# Altium PCB canRs485.PcbDoc
Units mm, origin at the board's own origin, x right, y up, seen from the top; angles counter-clockwise.
Board outline 152.4 x 101.6 mm, 2 copper layers (Top Layer, Bottom Layer); 13 components, 16 nets, 62 pads, 7 vias.
Unrouted connection lines stored in the file: 1.
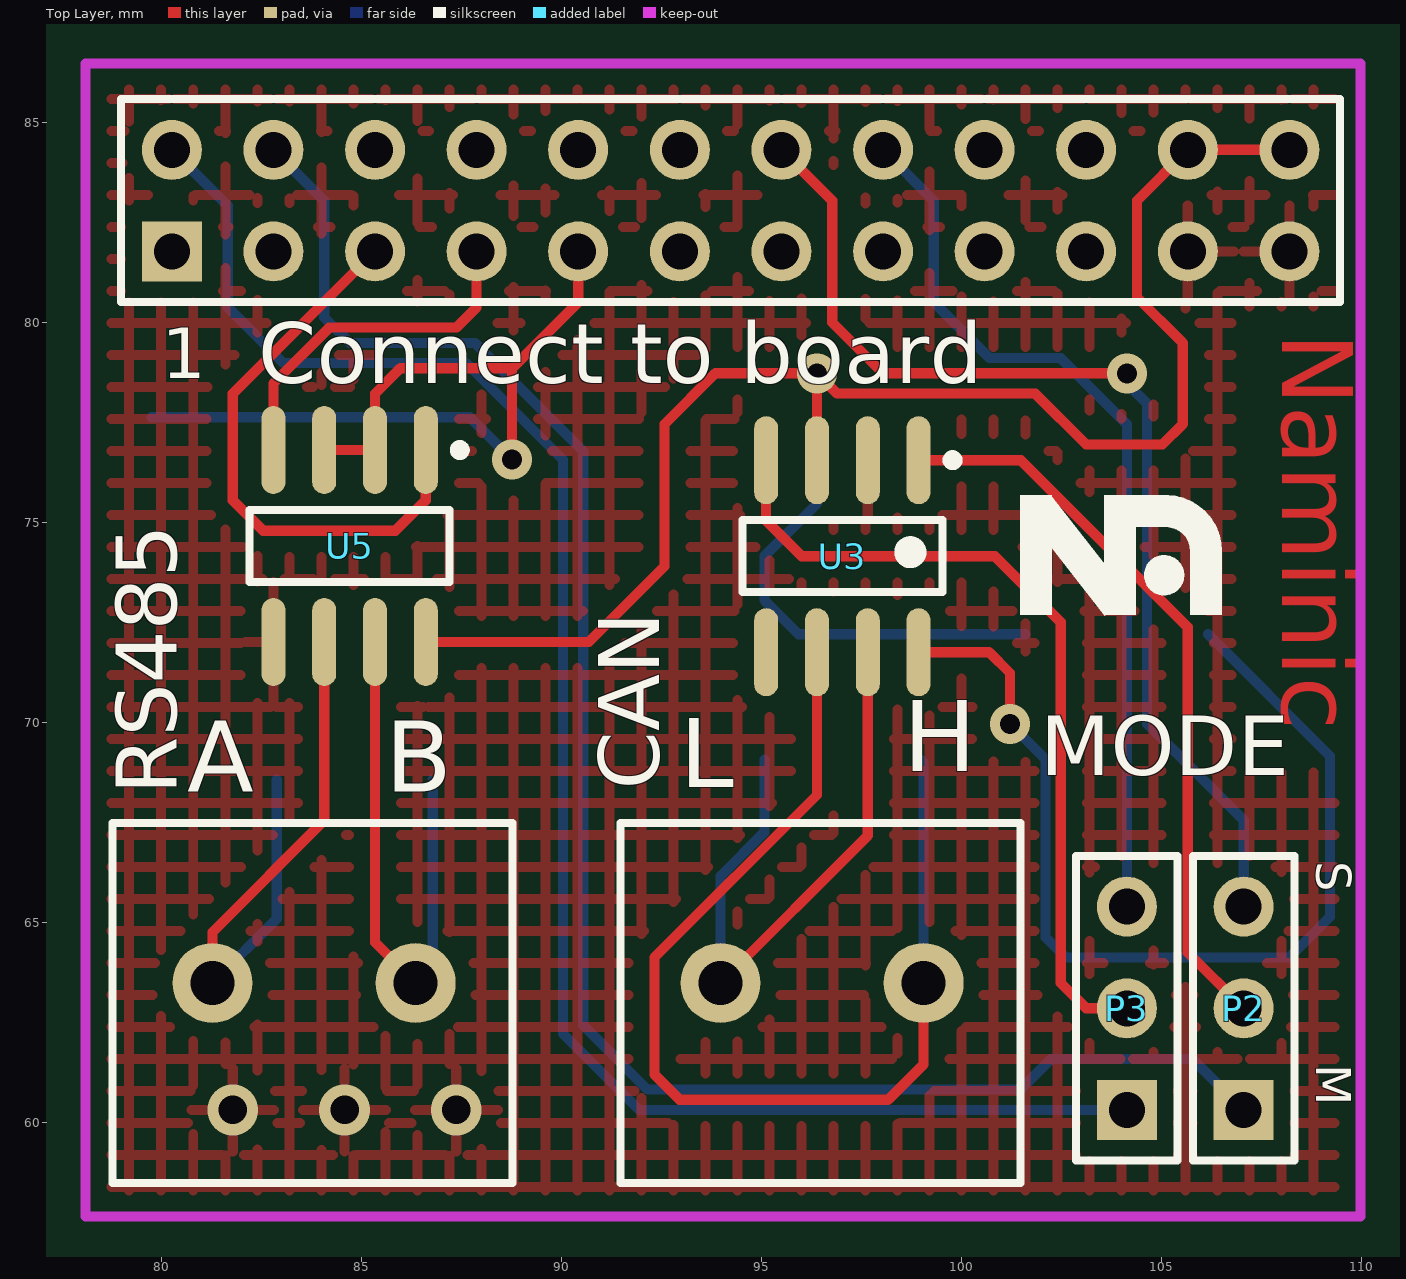
[diagram p0: Top Layer view]
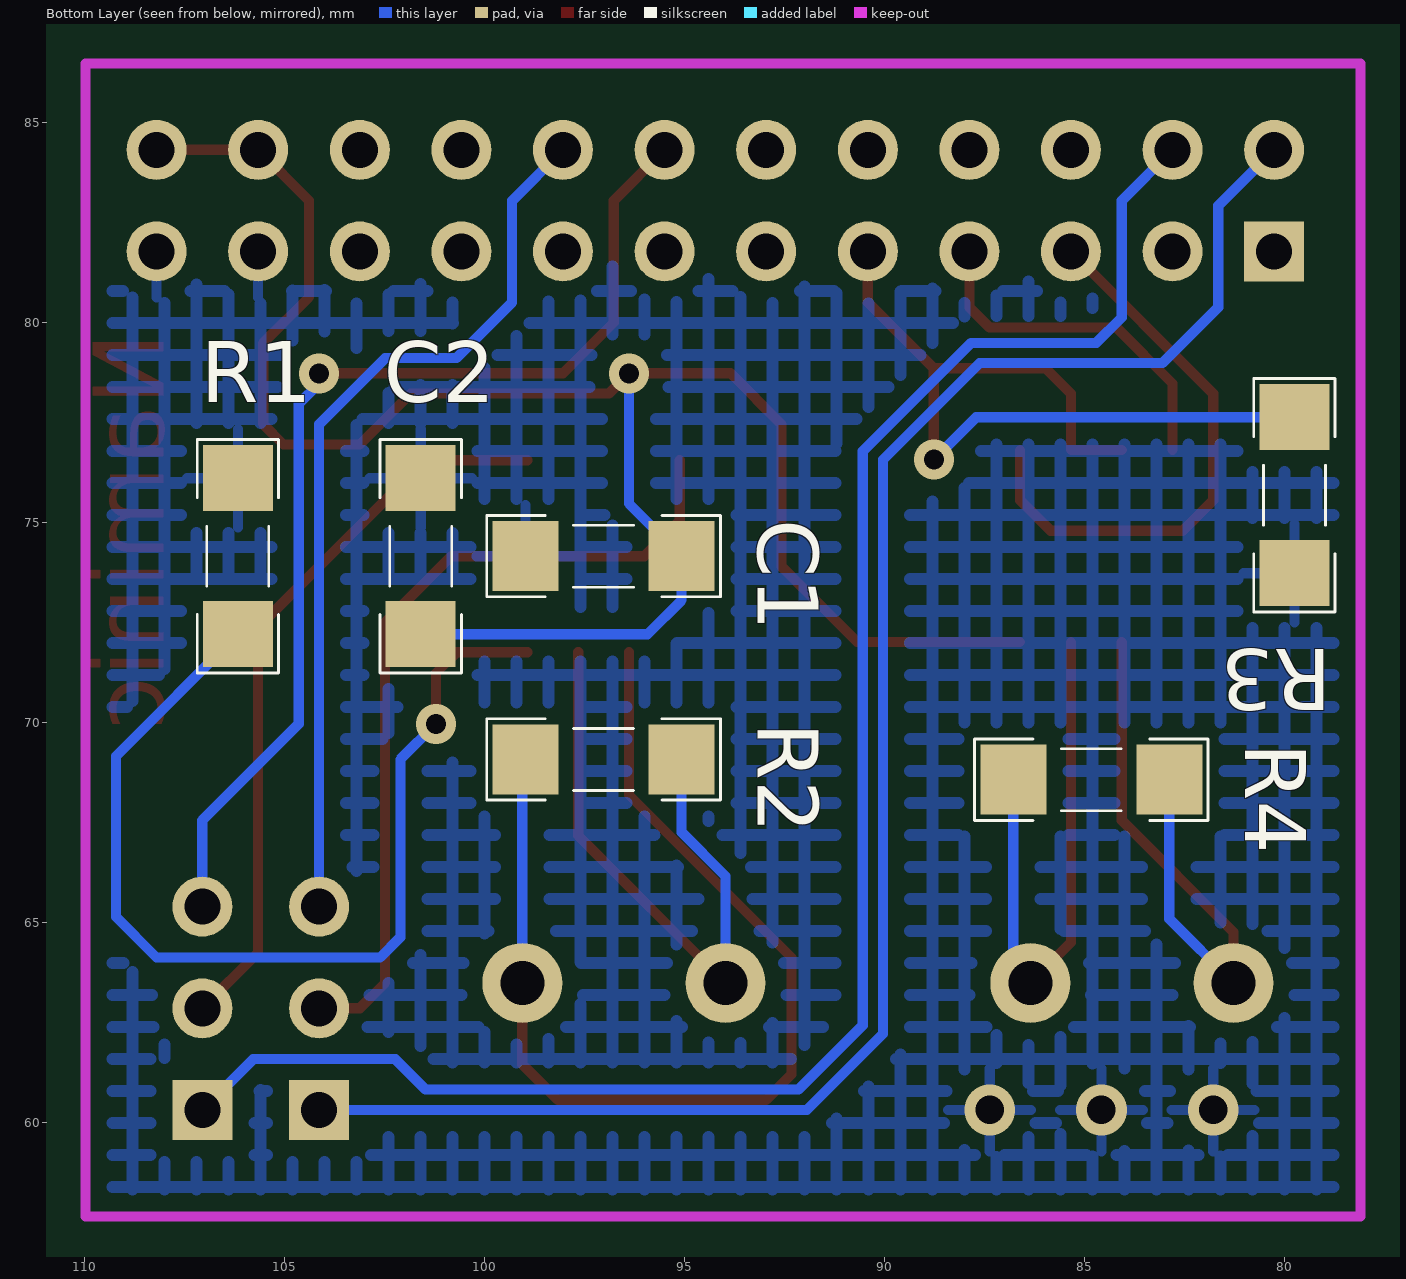
[diagram p1: Bottom Layer view, seen from below]
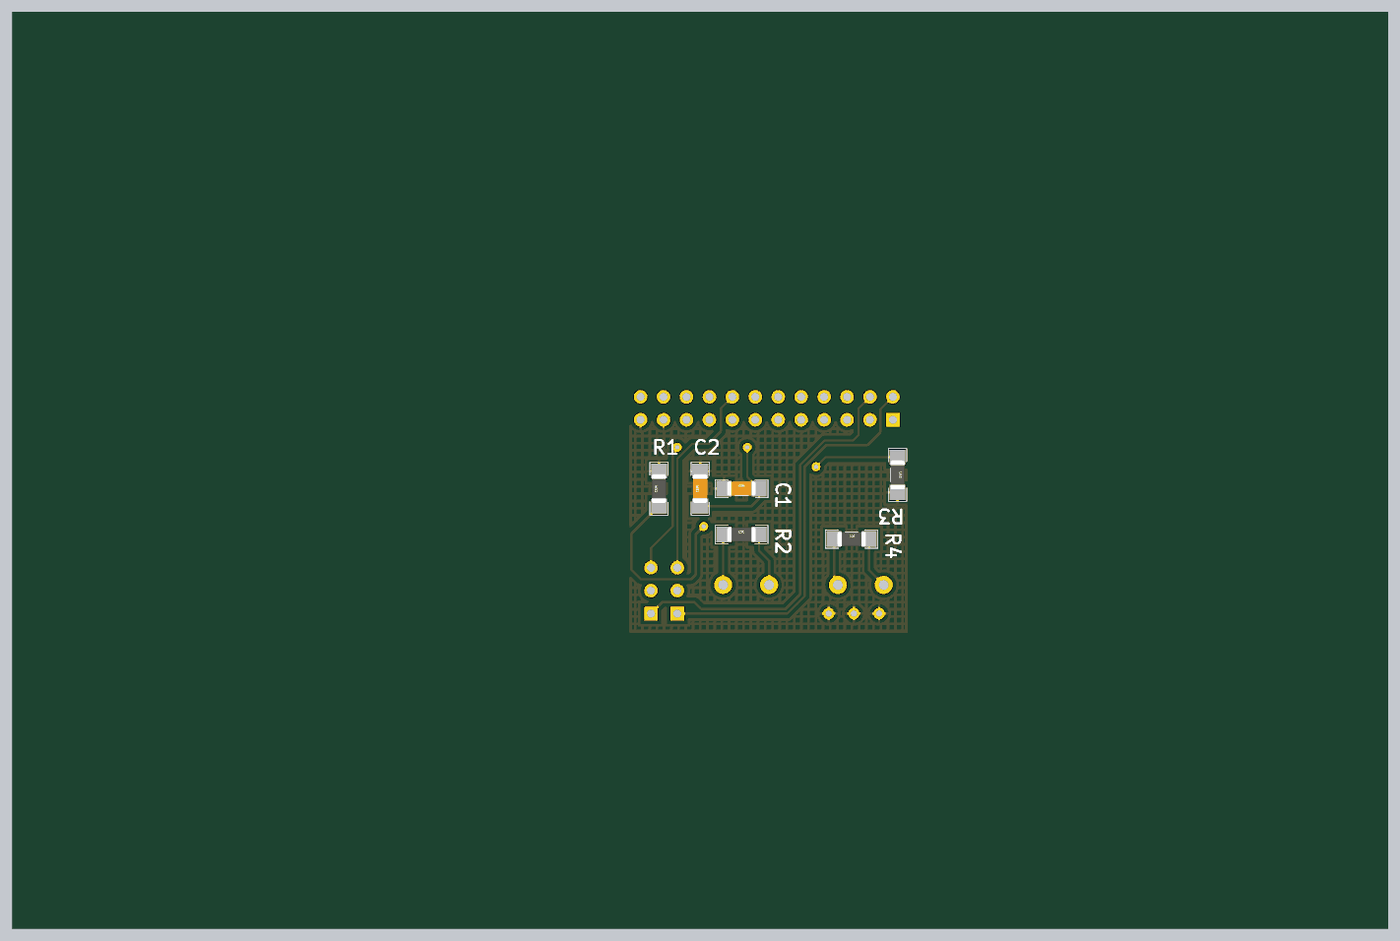
[diagram p2: 3D render of the assembled board from below, using the file's embedded part models]

## Layer stack, top to bottom
Top Layer: signal copper 0.0356
Dielectric: dielectric 0.32, FR-4, Dk 4.8
Bottom Layer: signal copper 0.0356

## Board outline
25.4,25.4 177.8,25.4 177.8,127 25.4,127

## Design rules (kind name [scope] priority, off if disabled: settings)
Clearance [All] p1: gap=0.4
PolygonConnect [All] p1: connectstyle=Relief reliefconductorwidth=0.254 reliefentries=4 polygonreliefangle="90 Angle"
RoutingVias [All] p1: holewidth=0.5 width=1 viastyle="Through Hole" minholewidth=0.5 minwidth=1 maxholewidth=0.5 maxwidth=1
SilkscreenOverComponentPads [All] p1: minsilkscreentomaskgap=0.254
SolderMaskExpansion [All] p1: expansion=0.102
Width [All] p1: maxlimit=0.254 minlimit=0.254 preferedwidth=0.254
27 further rules are at their usual default settings.

## Components (designator, comment, footprint, x,y, rotation, side; value= is the part's Value field where it differs from the comment)
C1 "100nF" CAPC4817X12N 97.028,74.168 r180 bottom
C2 "100nF" CAPC4817X12N 101.6,74.168 r90 bottom
CAN "CAN" POWER 93.98,63.5 r0 top (schematic designator P6)
"Connect to board" "Header 12X2" HDR2X12 80.264,81.788 r0 top (schematic designator P1)
P2 "Header 3" HDR1X3 107.061,60.325 r90 top
P3 "Header 3" HDR1X3 104.14,60.325 r90 top
R1 "10K" RESC4817X04N 106.172,74.168 r90 bottom
R2 "120" RESC4817X04N 97.028,69.088 r180 bottom
R3 "10K" RESC4817X04N 79.756,75.692 r270 bottom
R4 "120" RESC4817X04N 84.836,68.58 r180 bottom
RS485 "RS485" POWER 81.28,63.5 r0 top (schematic designator P7)
U3 "MCP2551-E/SN" SOIC-SN8_N 97.028,74.168 r270 top
U5 "MAX485ESA" NSO8_N 84.709,74.422 r270 top

## Footprints (in the part's own frame and the unit in brackets; to place one, negate y for a bottom-side part, rotate by r counter-clockwise, add the part's x,y. Pads: shape width x height; smd on the part's side, far side on the other; paste and mask are expansions set on the pad)
CAPC4817X12N [mm] "Chip Capacitor, 2-Leads, Body 4/80x1/70mm, IPC Medium Density-Design:Abbas Basereh"
  rect 1.65x1.75 smd: 1(-1.95,0) 2(1.95,0)
  silkscreen extent -2.92,-1.02 2.92,1.02, body extent -1.6,-0.8 1.6,0.8, height 1
HDR1X3 [mm] "Connector; Header; 3 Position"
  rect 1.5x1.5 hole 0.9: 1(0,0)
  round 1.5 hole 0.9: 2(2.54,0) 3(5.08,0)
  silkscreen extent -1.27,-1.27 6.35,1.27
HDR2X12 [mm] "Connector; Header; 12x2 Position"
  rect 1.5x1.5 hole 0.9: 1(0,0)
  round 1.5 hole 0.9: 2(0,2.54) 3(2.54,0) 4(2.54,2.54) 5(5.08,0) 6(5.08,2.54) 7(7.62,0) 8(7.62,2.54) 9(10.16,0) 10(10.16,2.54) 11(12.7,0) 12(12.7,2.54) 13(15.24,0) 14(15.24,2.54) 15(17.78,0) 16(17.78,2.54) 17(20.32,0) 18(20.32,2.54) 19(22.86,0) 20(22.86,2.54) 21(25.4,0) 22(25.4,2.54) 23(27.94,0) 24(27.94,2.54)
  silkscreen extent -1.27,-1.27 29.21,3.81
NSO8_N [mm] "SOIC, 8-Leads, Body 4.9x3.9mm, Pitch 1.27mm, IPC Medium Density"
  oval 2.2x0.6 smd: 1(-2.4,1.905) 2(-2.4,0.635) 3(-2.4,-0.635) 4(-2.4,-1.905) 5(2.4,-1.905) 6(2.4,-0.635) 7(2.4,0.635) 8(2.4,1.905)
  silkscreen extent -2.52,-2.5 0.9,2.88, body extent -2,-2.5 2,2.5, height 1.75
POWER [mm]
  round 2 hole 1.1: 1(0,0) 2(5.08,0)
  silkscreen extent -2.5,-5 7.5,4
RESC4817X04N [mm] "Chip Resistor, 2-Leads, Body 4/80x1/70mm, IPC Medium Density-Design:Abbas Basereh"
  rect 1.65x1.75 smd: 1(-1.95,0) 2(1.95,0)
  silkscreen extent -2.92,-1.02 2.92,1.02, body extent -1.6,-0.8 1.6,0.8, height 1
SOIC-SN8_N [mm] "SOIC, 8-Leads, Body 4.9x3.8mm, Pitch 1.27mm, IPC Medium Density"
  oval 2.2x0.6 smd: 1(-2.4,1.905) 2(-2.4,0.635) 3(-2.4,-0.635) 4(-2.4,-1.905) 5(2.4,-1.905) 6(2.4,-0.635) 7(2.4,0.635) 8(2.4,1.905)
  silkscreen extent -2.52,-2.5 0.9,2.88, body extent -2,-2.5 2,2.5, height 1.75

## Part data
C1 C2: library part CAP, "Capacitor"
CAN RS485: library part "Header 2", "Header, 2-Pin"
"Connect to board": "Header, 12-Pin, Dual row"
P2 P3: "Header, 3-Pin"
R1 R2 R3 R4: library part res1, "Resistor"
U3: "High-Speed CAN Transceiver, 8-Pin SOIC, Extended Temperature"
U5: "Low-Power, Slew-Rate-Limited RS-485/RS-422 Transceiver"

## Via types
v1: diameter 1, hole 0.5, Top Layer to Bottom Layer, 4 vias
v2: diameter 1.27, hole 0.711, Top Layer to Bottom Layer, 3 vias

## Nets (pads, with @x,y where several pads share a name; then routed paths per layer and width w, separated by ;. In a path a pad name is that pad's centre, name@x,y a point inside that pad or via, vN(x,y) a via of type N, cw(c..) or ccw(c..) an arc to the next point about the centre after c; other vN are vias at no path point)
+5: "Connect to board.22" "Connect to board.24" C1.2 C2.1 U3.3 U5.8 | length 50.4
  Top Layer w0.254: U5.8 90.691,72.022 92.583,73.914 92.583,77.47 93.853,78.74 v1(96.393,78.74) ; U3.3 v1(96.393,78.74) ; 108.204,84.328 105.664,84.328 104.394,83.058 104.394,80.645 105.537,79.502 105.537,77.47 105.029,76.962 103.124,76.962 101.854,78.232 96.901,78.232 v1(96.393,78.74)
  Bottom Layer w0.254: v1(96.393,78.74) 96.393,75.483 C1.2 95.078,73.07 95.93,72.218 C2.1
CAN_RX: P3.2 U3.4 | length 20.9
  Top Layer w0.254: U3.4 95.123,75.057 96.012,74.168 100.838,74.168 102.489,72.517 102.489,63.5 103.124,62.865 P3.2
CAN_RX_M: "Connect to board.2" P3.1 | length 43.7
  Bottom Layer w0.254: 80.264,84.328 81.661,82.931 81.661,80.391 83.058,78.994 87.63,78.994 90.043,76.581 90.043,62.23 91.948,60.325 P3.1
CAN_RX_S: "Connect to board.16" P3.3 | length 22.5
  Bottom Layer w0.254: 98.044,84.328 99.314,83.058 99.314,80.518 100.711,79.121 102.489,79.121 104.14,77.47 P3.3
CAN_TX: P2.2 U3.1 | length 18.6
  Top Layer w0.254: U3.1 101.486,76.568 105.664,72.39 105.664,64.262 P2.2
CAN_TX_M: "Connect to board.4" P2.1 | length 44.9
  Bottom Layer w0.254: 82.804,84.328 84.074,83.058 84.074,80.137 84.709,79.502 87.84,79.502 90.551,76.791 90.551,62.44 92.158,60.833 101.473,60.833 102.235,61.595 105.791,61.595 P2.1
CAN_TX_S: "Connect to board.14" P2.3 | length 27.3
  Top Layer w0.254: 95.504,84.328 96.774,83.058 96.774,80.01 98.044,78.74 v1(104.14,78.74)
  Bottom Layer w0.254: v1(104.14,78.74) 104.14,78.486 104.648,77.978 104.648,69.977 107.061,67.564 P2.3
CANH: CAN.1 R2.2 U3.7 | length 15.8
  Top Layer w0.254: CAN.1 97.663,67.183 U3.7
  Bottom Layer w0.254: CAN.1 93.98,66.167 95.078,67.265 R2.2
CANL: CAN.2 R2.1 U3.6 | length 27.3
  Top Layer w0.254: U3.6 96.393,68.199 92.329,64.135 92.329,61.214 92.964,60.579 98.171,60.579 99.06,61.468 CAN.2
  Bottom Layer w0.254: R2.1 99.06,69.006 CAN.2
GND: "Connect to board.21" "Connect to board.23" C1.1 C2.2 R1.2 R3.2 U3.2 U5.5
  other v2: 81.788,60.325 84.582,60.325 87.376,60.325
NetP7_1: R4.2 RS485.1 U5.6 | length 15.4
  Top Layer w0.254: RS485.1 81.28,64.77 84.074,67.564 U5.6
  Bottom Layer w0.254: RS485.1 82.886,65.106 R4.2
NetP7_2: R4.1 RS485.2 U5.7 | length 14.2
  Top Layer w0.254: U5.7 85.344,64.516 RS485.2
  Bottom Layer w0.254: RS485.2 86.786,63.926 R4.1
NetR1_1: R1.1 U3.8 | length 25.5
  Top Layer w0.254: U3.8 100.698,71.768 101.219,71.247 v1(101.219,69.977)
  Bottom Layer w0.254: v1(101.219,69.977) 102.108,69.088 102.108,64.643 102.616,64.135 108.204,64.135 109.22,65.151 109.22,69.17 R1.1
RS485_DIR: "Connect to board.9" R3.1 U5.2 U5.3 | length 21.7
  Top Layer w0.254: U5.3 U5.2 85.344,78.232 85.979,78.867 88.773,78.867 ; v1(88.773,76.581) 88.773,78.867 ; 90.424,81.788 90.424,80.518 88.773,78.867
  Bottom Layer w0.254: R3.1 87.712,77.642 v1(88.773,76.581)
RS485_RXD: "Connect to board.7" U5.4 | length 8.9
  Top Layer w0.254: U5.4 82.804,78.486 84.201,79.883 87.376,79.883 87.884,80.391 87.884,81.788
RS485_TXD: "Connect to board.5" U5.1 | length 14.4
  Top Layer w0.254: 85.344,81.788 81.788,78.232 81.788,78.105 81.788,75.565 82.55,74.803 85.852,74.803 86.614,75.565 U5.1
pads on no net: "Connect to board.1" "Connect to board.3" "Connect to board.6" "Connect to board.8" "Connect to board.10" "Connect to board.11" "Connect to board.12" "Connect to board.13" "Connect to board.15" "Connect to board.17" "Connect to board.18" "Connect to board.19" "Connect to board.20" U3.5

## Polygon pours and split planes (outlines as drawn)
GND on Bottom Layer "Bottom Layer-No Net" (hatched 90Degree grid 0.8 track 0.3, remove dead copper, pour order 1000): 78.105,86.487 109.982,86.487 109.982,57.658 78.105,57.658
GND on Top Layer "Bottom Layer-No Net" (hatched 90Degree grid 0.8 track 0.25, pour order 1001): 78.105,86.487 109.982,86.487 109.982,57.658 78.105,57.658

## Keep-outs
Keep-Out Layer:
  lines w0.254: 78.105,57.658 78.105,57.912 78.105,85.725 78.105,86.487 109.982,86.487 109.982,57.658 78.105,57.658

## Other copper
Top Layer:
  text "Naminic" at 107.442,79.756 h3.05 r270

## Silkscreen, mask and mechanical layers (free items; w line width, h text height)
Top Overlay:
  circle w0.5: c105.073,73.692 r0.255
  rectangle: 101.473,72.692 102.273,75.692
  rectangle: 103.573,72.692 104.373,75.692
  region: 103.59,72.674 104.22,73.166 102.274,75.657 101.644,75.164
  rectangle: 105.723,72.692 106.523,74.292
  region: 105.123,74.892 105.123,75.692 103.573,75.692 103.573,74.892
  lines w0.8: 105.123,75.292 cw(c105.123,74.292) 106.123,74.292
  text "H" at 98.552,68.199 h3.05
  text "MODE" at 101.981,68.199 h2.54
  text "L" at 92.964,67.818 h3.05
  text "A" at 80.645,67.691 h3.05
  text "B" at 85.598,67.691 h3.05
  text "S" at 108.585,66.548 h1.5 r270
  text "M" at 108.585,61.468 h1.5 r270

## Text inside footprints (layer, text, board x,y; h text height)
"Connect to board": Top Overlay "1" at 80.01,78.613 h1.27